# Altium PCB PCB1.PcbDoc
Units mm, origin at the board's own origin, x right, y up, seen from the top; angles counter-clockwise.
Board outline 52.25 x 52.25 mm, 2 copper layers (Top Layer, Bottom Layer); 13 components, 106 nets, 220 pads, 0 vias.
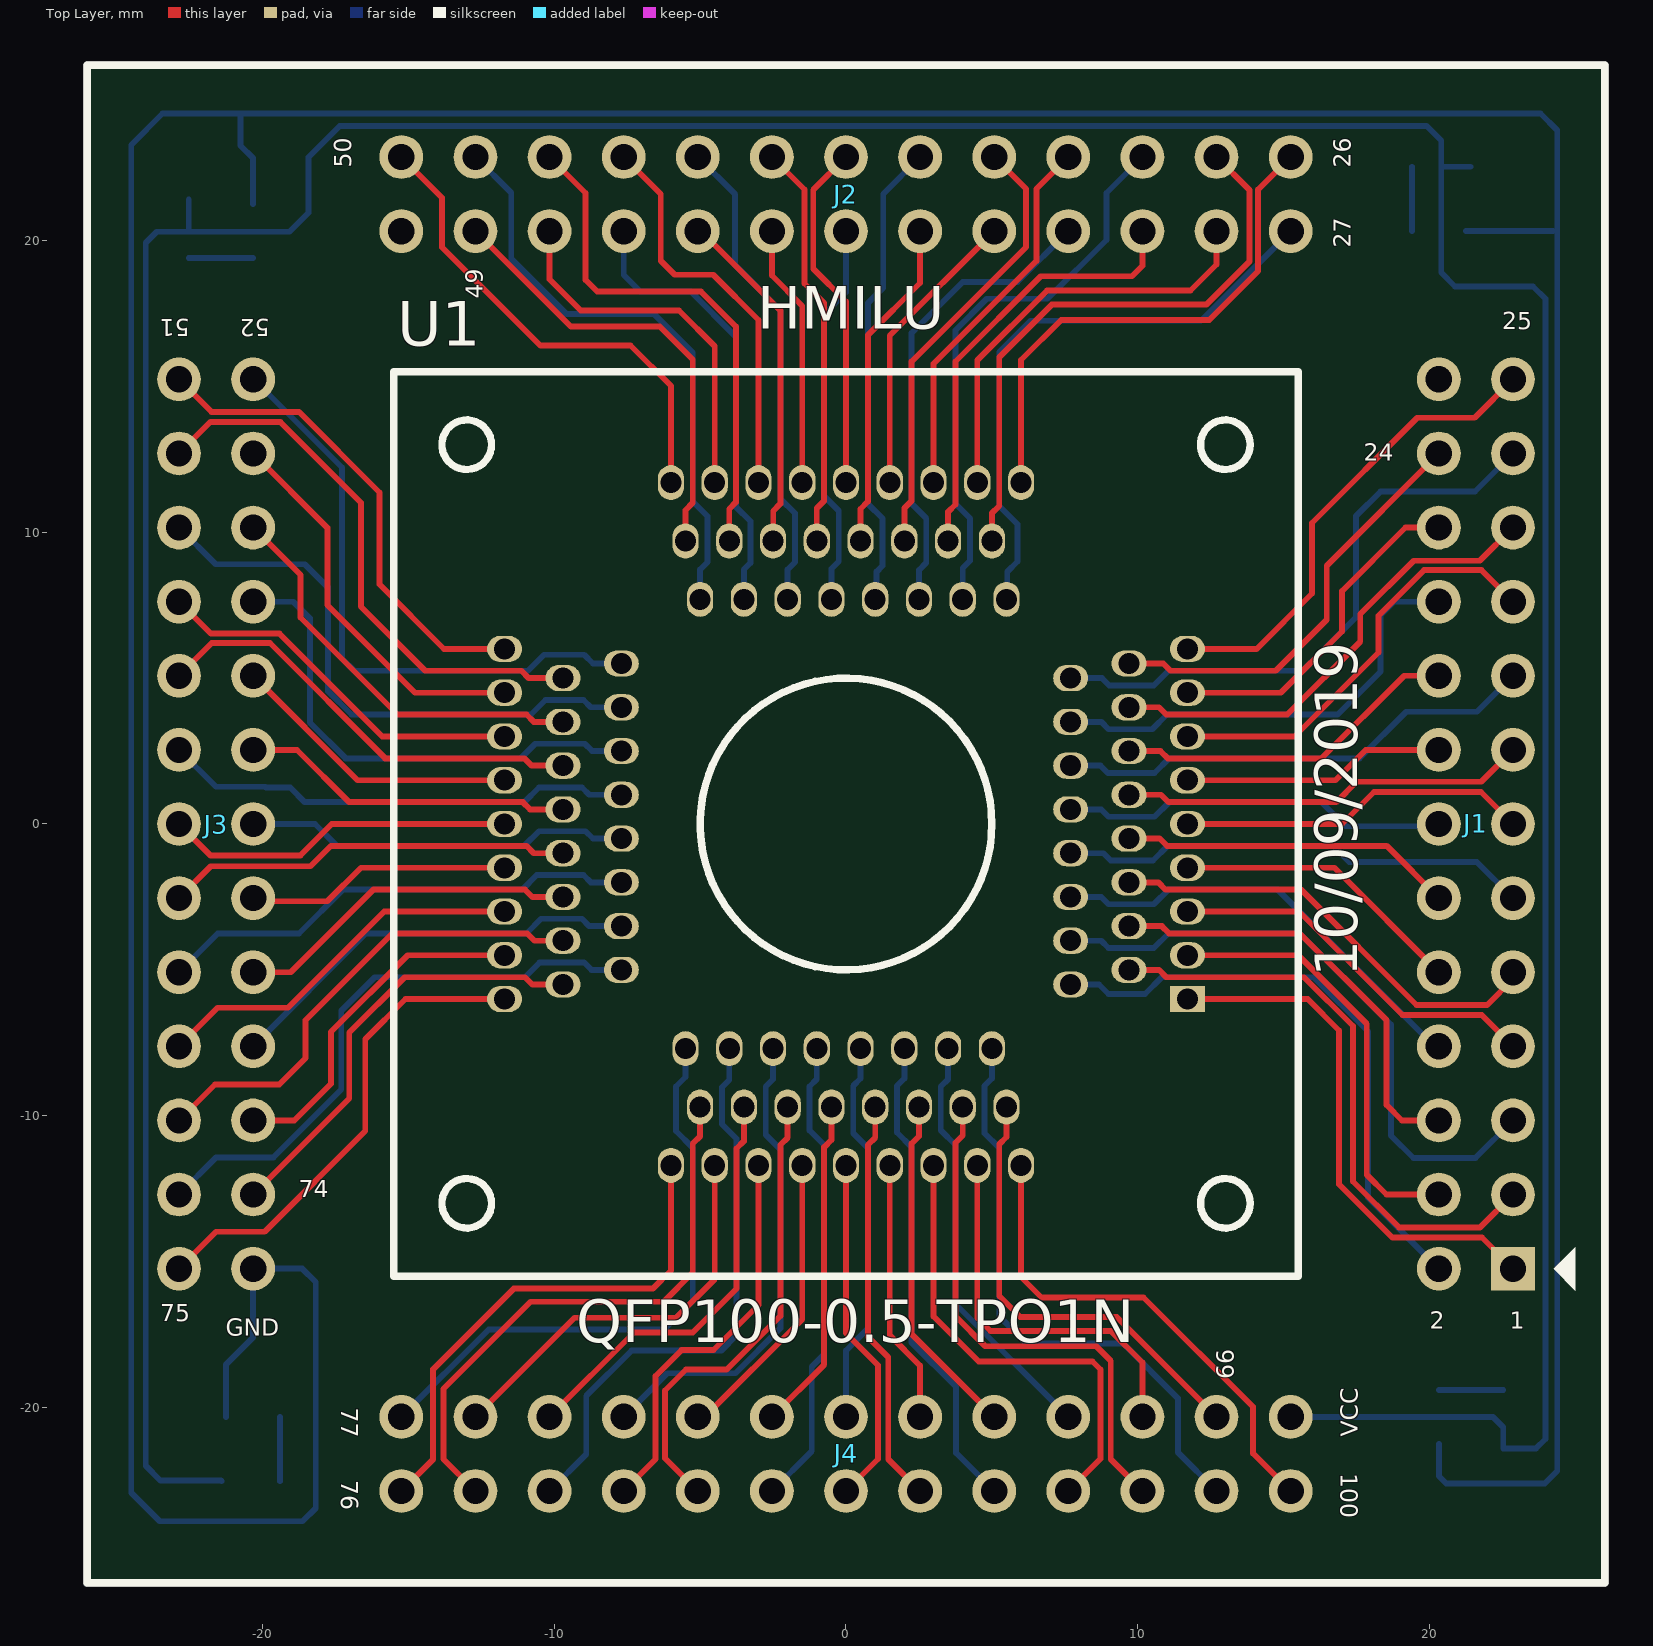
[diagram p0: Top Layer view]
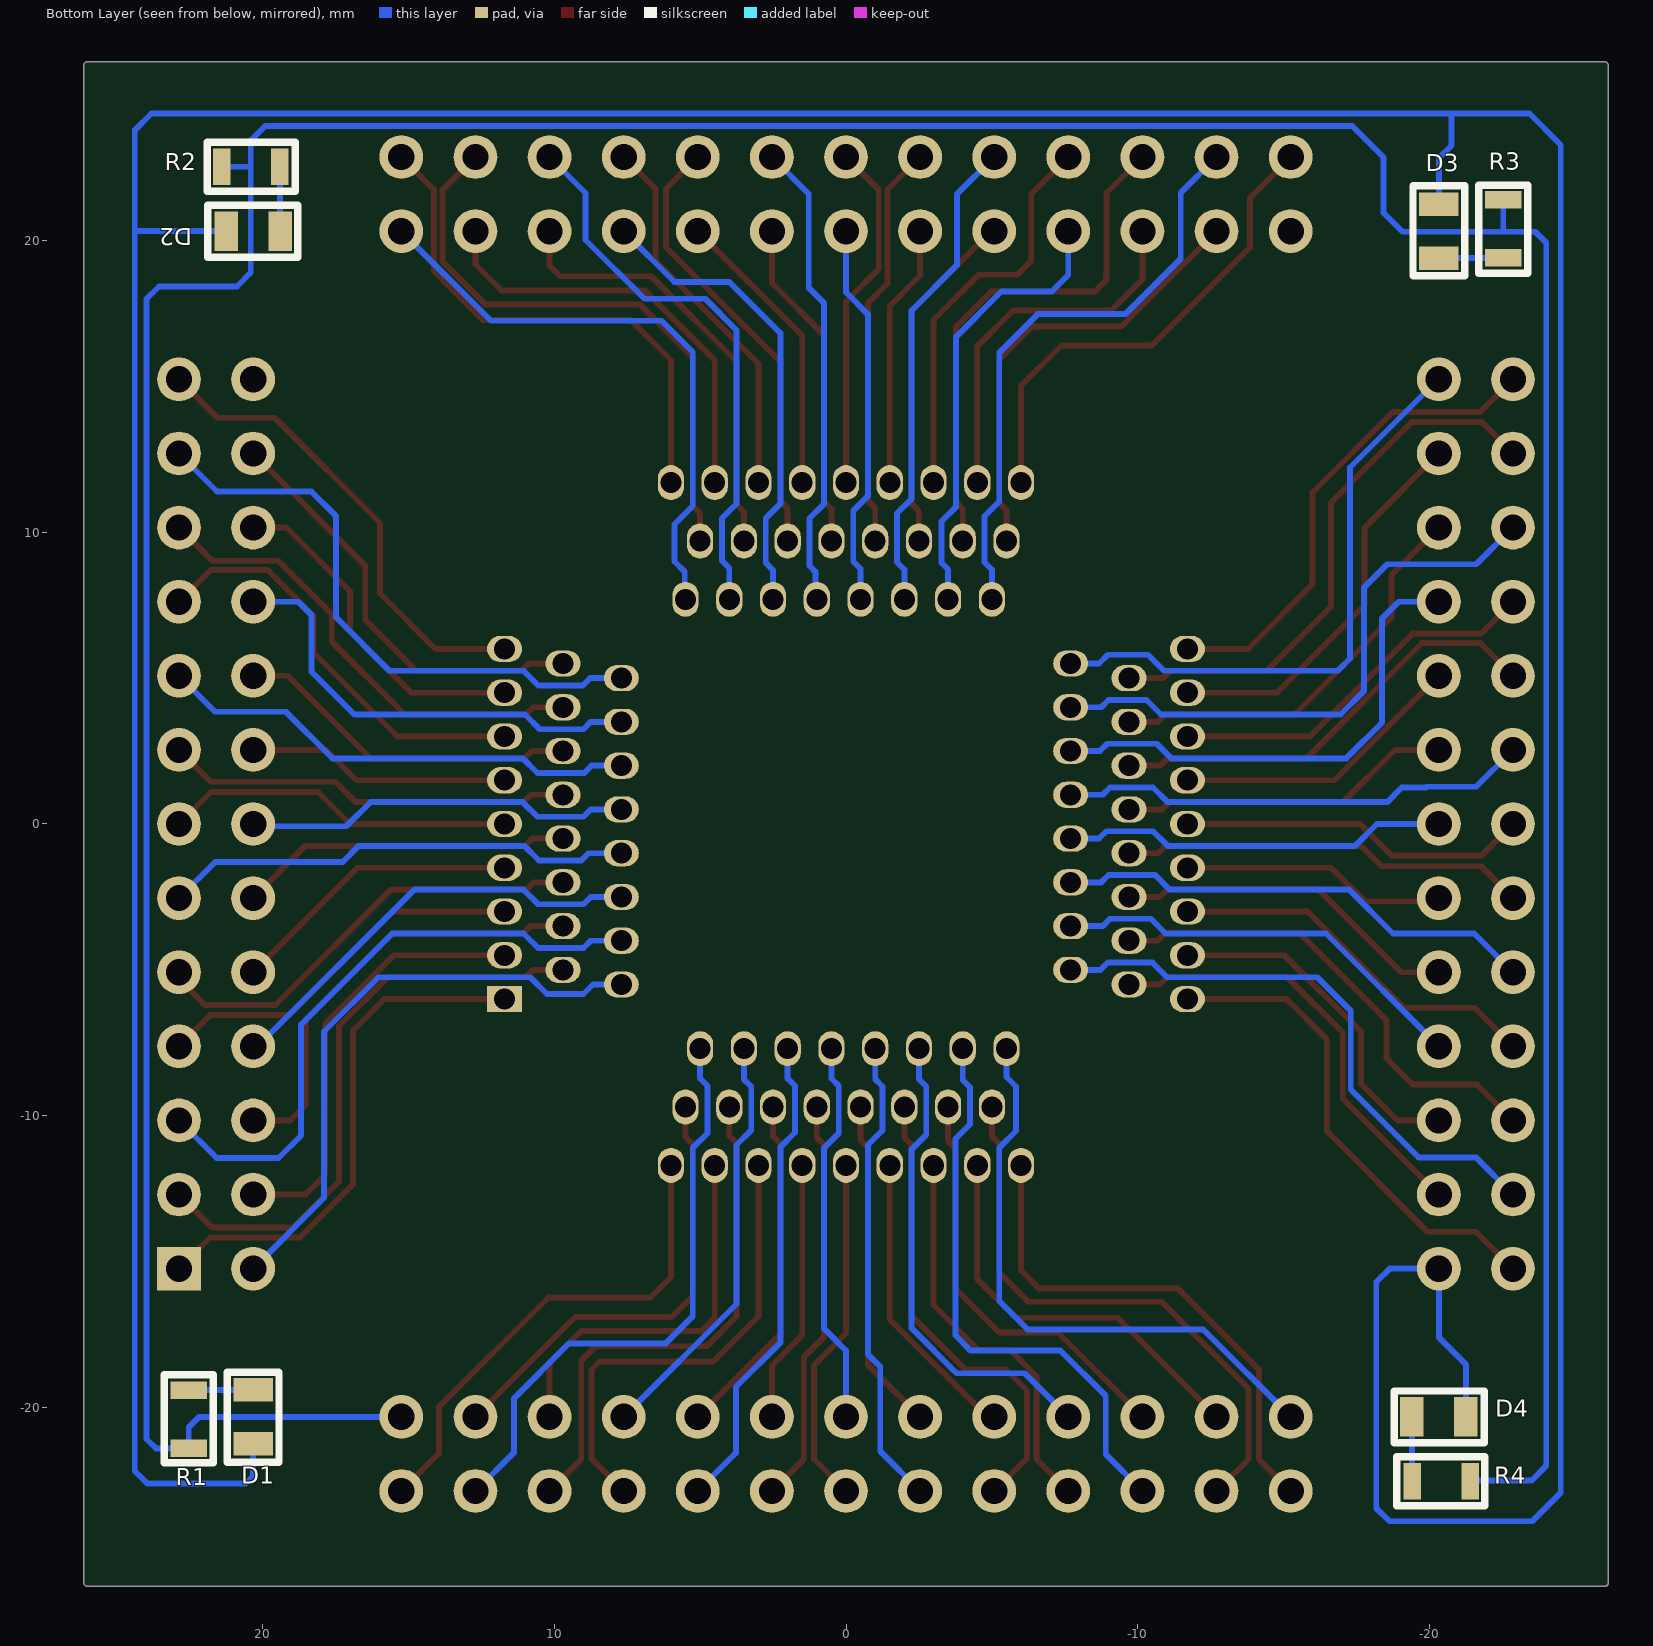
[diagram p1: Bottom Layer view, seen from below]

## Layer stack, top to bottom
Top Solder: solder mask 0.0102, Solder Resist, Dk 3.5
Top Layer: signal copper 0.0356
Dielectric 1: dielectric 0.32, FR-4, Dk 4.8
Bottom Layer: signal copper 0.0356
Bottom Solder: solder mask 0.0102, Solder Resist, Dk 3.5

## Board outline
-26.127,-26 -26.127,26 cw(c-26,26) -26,26.127 26,26.127 cw(c26,26) 26.127,26 26.127,-26 cw(c26,-26) 26,-26.127 -26,-26.127 cw(c-26,-26)
cut-out: 2.5,4.33
cut-out: 0.25,5.08
cut-out: 0.25,5.08

## Design rules (kind name [scope] priority, off if disabled: settings)
Clearance [All] p1: gap=0.01 ignorepadtopadclearanceinfootprint=FALSE
PolygonConnect [All] p1: connectstyle=Relief reliefconductorwidth=0.254 reliefentries=4 polygonreliefangle="90 Angle" airgapwidth=0.254
RoutingVias [All] p1: holewidth=0.711 width=1.27 viastyle="Through Hole" minholewidth=0.711 minwidth=1.27 maxholewidth=0.711 maxwidth=1.27
SolderMaskExpansion [All] p1: expansion=0.102
Width [All] p1: maxlimit=0.254 minlimit=0.2 preferedwidth=0.2
30 further rules are at their usual default settings.

## Components (designator, comment, footprint, x,y, rotation, side; value= is the part's Value field where it differs from the comment)
D1 "LED0805" L0805RED 20.32,-20.32 r180 bottom
D2 "LED0805" L0805RED 20.32,20.32 r270 bottom
D3 "LED0805" L0805RED -20.32,20.32 r0 bottom
D4 "LED0805" L0805RED -20.32,-20.32 r90 bottom
J1 "Header 13x2 TH Pitch 2.54mm" "Header 13x2 TH Pitch 2.54mm"#1 21.59,1.27 r180 top
J2 "Header 13x2 TH Pitch 2.54mm" "Header 13x2 TH Pitch 2.54mm"#2 -1.27,21.59 r270 top
J3 "Header 13x2 TH Pitch 2.54mm" "Header 13x2 TH Pitch 2.54mm"#2 -21.59,-1.27 r0 top
J4 "Header 13x2 TH Pitch 2.54mm" "Header 13x2 TH Pitch 2.54mm"#2 1.27,-21.59 r90 top
R1 "10k" R0805 21,-20.45 r270 bottom
R2 "10k" R0805 20.45,21 r0 bottom
R3 "10k" R0805 -21,20.45 r90 bottom
R4 "10k" R0805 -20.45,-21 r180 bottom
U1 "QFP100-0.5 SOCKET" "QFP100-0.5 SOCKET" 0,0 r0 top

## Footprints (in the part's own frame and the unit in brackets; to place one, negate y for a bottom-side part, rotate by r counter-clockwise, add the part's x,y. Pads: shape width x height; smd on the part's side, far side on the other; paste and mask are expansions set on the pad)
"Header 13x2 TH Pitch 2.54mm"#1 [mm]
  rect 1.5x1.5 hole 0.9: 1(-1.27,16.51)
  round 1.5 hole 0.9: 2(1.27,16.51) 3(-1.27,13.97) 4(1.27,13.97) 5(-1.27,11.43) 6(1.27,11.43) 7(-1.27,8.89) 8(1.27,8.89) 9(-1.27,6.35) 10(1.27,6.35) 11(-1.27,3.81) 12(1.27,3.81) 13(-1.27,1.27) 14(1.27,1.27) 15(-1.27,-1.27) 16(1.27,-1.27) 17(-1.27,-3.81) 18(1.27,-3.81) 19(-1.27,-6.35) 20(1.27,-6.35) 21(-1.27,-8.89) 22(1.27,-8.89) 23(-1.27,-11.43) 24(1.27,-11.43) 25(-1.27,-13.97) 26(1.27,-13.97)
  body extent -2.54,-15.24 2.54,17.78, height 9.5
"Header 13x2 TH Pitch 2.54mm"#2 [mm]
  round 1.5 hole 0.9: 1(-1.27,16.51) 2(1.27,16.51) 3(-1.27,13.97) 4(1.27,13.97) 5(-1.27,11.43) 6(1.27,11.43) 7(-1.27,8.89) 8(1.27,8.89) 9(-1.27,6.35) 10(1.27,6.35) 11(-1.27,3.81) 12(1.27,3.81) 13(-1.27,1.27) 14(1.27,1.27) 15(-1.27,-1.27) 16(1.27,-1.27) 17(-1.27,-3.81) 18(1.27,-3.81) 19(-1.27,-6.35) 20(1.27,-6.35) 21(-1.27,-8.89) 22(1.27,-8.89) 23(-1.27,-11.43) 24(1.27,-11.43) 25(-1.27,-13.97) 26(1.27,-13.97)
  body extent -2.54,-15.24 2.54,17.78, height 9.5
L0805RED [mm]
  rect 1.35x0.8 smd: 1(0,0.925) 2(0,-0.925)
  silkscreen extent -0.89,-1.55 0.89,1.52, body extent -0.67,-1.05 0.68,1.05, height 0.9
"QFP100-0.5 SOCKET" [mm]
  rect 1.2x0.9 hole 0.72: 1(11.7,-6)
  oval 1.2x0.9 hole 0.72: 2(7.7,-5.5) 3(9.7,-5) 4(11.7,-4.5) 5(7.7,-4) 6(9.7,-3.5) 7(11.7,-3) 8(7.7,-2.5) 9(9.7,-2) 10(11.7,-1.5) 11(7.7,-1) 12(9.7,-0.5) 13(11.7,0) 14(7.7,0.5) 15(9.7,1) 16(11.7,1.5) 17(7.7,2) 18(9.7,2.5) 19(11.7,3) 20(7.7,3.5) 21(9.7,4) 22(11.7,4.5) 23(7.7,5) 24(9.7,5.5) 25(11.7,6) 51(-11.7,6) 52(-7.7,5.5) 53(-9.7,5) 54(-11.7,4.5) 55(-7.7,4) 56(-9.7,3.5) 57(-11.7,3) 58(-7.7,2.5) 59(-9.7,2) 60(-11.7,1.5) 61(-7.7,1) 62(-9.7,0.5) 63(-11.7,0) 64(-7.7,-0.5) 65(-9.7,-1) 66(-11.7,-1.5) 67(-7.7,-2) 68(-9.7,-2.5) 69(-11.7,-3) 70(-7.7,-3.5) 71(-9.7,-4) 72(-11.7,-4.5) 73(-7.7,-5) 74(-9.7,-5.5) 75(-11.7,-6)
  oval 0.9x1.2 hole 0.72: 26(6,11.7) 27(5.5,7.7) 28(5,9.7) 29(4.5,11.7) 30(4,7.7) 31(3.5,9.7) 32(3,11.7) 33(2.5,7.7) 34(2,9.7) 35(1.5,11.7) 36(1,7.7) 37(0.5,9.7) 38(0,11.7) 39(-0.5,7.7) 40(-1,9.7) 41(-1.5,11.7) 42(-2,7.7) 43(-2.5,9.7) 44(-3,11.7) 45(-3.5,7.7) 46(-4,9.7) 47(-4.5,11.7) 48(-5,7.7) 49(-5.5,9.7) 50(-6,11.7) 76(-6,-11.7) 77(-5.5,-7.7) 78(-5,-9.7) 79(-4.5,-11.7) 80(-4,-7.7) 81(-3.5,-9.7) 82(-3,-11.7) 83(-2.5,-7.7) 84(-2,-9.7) 85(-1.5,-11.7) 86(-1,-7.7) 87(-0.5,-9.7) 88(0,-11.7) 89(0.5,-7.7) 90(1,-9.7) 91(1.5,-11.7) 92(2,-7.7) 93(2.5,-9.7) 94(3,-11.7) 95(3.5,-7.7) 96(4,-9.7) 97(4.5,-11.7) 98(5,-7.7) 99(5.5,-9.7) 100(6,-11.7)
  silkscreen extent -15.5,-15.5 15.5,15.5
R0805 [mm]
  rect 0.6x1.24 smd: 1(-1.05,-1.524) 2(0.95,-1.524)
  silkscreen extent -1.57,-2.36 1.45,-0.69, body extent -1.05,-2.15 0.95,-0.9, height 0.45

## Part data
R1 R2 R3 R4: library part Resistor

## Nets (pads, with @x,y where several pads share a name; then routed paths per layer and width w, separated by ;. In a path a pad name is that pad's centre, name@x,y a point inside that pad or via, vN(x,y) a via of type N, cw(c..) or ccw(c..) an arc to the next point about the centre after c; other vN are vias at no path point)
1_1: J1.1 U1.1 | length 18.1
  Top Layer w0.2: U1.1 15.825,-6 16.9,-7.075 16.9,-12.35 18.725,-14.175 21.795,-14.175 J1.1
1_2: J1.2 U1.2 | length 20.5
  Bottom Layer w0.2: U1.2 8.675,-5.5 9,-5.825 10.25,-5.825 10.825,-5.25 16.025,-5.25 17.89,-7.115 17.89,-12.809 J1.2
1_3: J1.3 U1.3 | length 20.4
  Top Layer w0.2: U1.3 10.725,-5 10.975,-5.25 15.7,-5.25 17.375,-6.925 17.375,-12.25 18.95,-13.825 21.735,-13.825 J1.3
1_4: J1.4 U1.4 | length 15
  Top Layer w0.2: U1.4 15.5,-4.5 17.85,-6.85 17.85,-12.025 18.525,-12.7 J1.4
1_5: J1.5 U1.5 | length 21.4
  Bottom Layer w0.2: U1.5 8.75,-4 9,-4.25 10.55,-4.25 11.05,-3.75 15.55,-3.75 18.675,-6.875 18.675,-10.674 19.451,-11.45 21.57,-11.45 J1.5
1_6: J1.6 U1.6 | length 15.1
  Top Layer w0.2: U1.6 10.825,-3.5 11.075,-3.75 15.55,-3.75 18.53,-6.73 18.53,-9.63 19.06,-10.16 J1.6
1_7: J1.7 U1.7 | length 13.1
  Top Layer w0.2: U1.7 15.525,-3 19.075,-6.55 21.79,-6.55 J1.7
1_8: J1.8 U1.8 | length 15.2
  Bottom Layer w0.2: U1.8 8.75,-2.5 9,-2.75 10.55,-2.75 11.05,-2.25 14.8,-2.25 20.17,-7.62 J1.8
1_9: J1.9 U1.9 | length 15.5
  Top Layer w0.2: U1.9 10.7,-2 10.95,-2.25 15.6,-2.25 19.55,-6.2 21.975,-6.2 22.86,-5.315 J1.9
1_10: J1.10 U1.10 | length 10.1
  Top Layer w0.2: U1.10 16.74,-1.5 J1.10
1_11: J1.11 U1.11 | length 16.2
  Bottom Layer w0.2: U1.11 8.825,-1 9.075,-1.25 10.525,-1.25 11.025,-0.75 16.7,-0.75 17.25,-1.3 21.62,-1.3 J1.11
1_12: J1.12 U1.12 | length 11.5
  Top Layer w0.2: U1.12 10.75,-0.5 11,-0.75 18.53,-0.75 J1.12
1_13: J1.13 U1.13 | length 12.1
  Top Layer w0.2: U1.13 17,0 18.1,1.1 21.76,1.1 J1.13
1_14: J1.14 U1.14 | length 13.3
  Bottom Layer w0.2: U1.14 8.75,0.5 9,0.25 10.575,0.25 11.075,0.75 16.3,0.75 17.125,-0.075 20.245,-0.075 J1.14
1_15: J1.15 U1.15 | length 14
  Top Layer w0.2: U1.15 10.8,1 11.05,0.75 16.8,0.75 17.5,1.45 21.77,1.45 J1.15
1_16: J1.16 U1.16 | length 9.1
  Top Layer w0.2: U1.16 16.775,1.5 17.815,2.54 J1.16
1_17: J1.17 U1.17 | length 16.6
  Bottom Layer w0.2: U1.17 8.725,2 8.975,1.75 10.575,1.75 11.075,2.25 17.6,2.25 19.2,3.85 21.63,3.85 J1.17
1_18: J1.18 U1.18 | length 11.9
  Top Layer w0.2: U1.18 10.775,2.5 11.025,2.25 16.3,2.25 19.13,5.08 J1.18
1_19: J1.19 U1.19 | length 14.7
  Top Layer w0.2: U1.19 15.375,3 18.25,5.875 18.25,7.137 19.813,8.7 21.78,8.7 J1.19
1_20: J1.20 U1.20 | length 15.7
  Bottom Layer w0.2: U1.20 8.75,3.5 9,3.25 10.5,3.25 11,3.75 16.85,3.75 18.325,5.225 18.325,7.175 18.77,7.62 J1.20
1_21: J1.21 U1.21 | length 16.5
  Top Layer w0.2: U1.21 10.725,4 10.975,3.75 15.125,3.75 17.625,6.25 17.625,7.195 19.455,9.025 21.725,9.025 J1.21
1_22: J1.22 U1.22 | length 11.8
  Top Layer w0.2: U1.22 14.9,4.5 17,6.6 17,7.981 19.179,10.16 J1.22
1_23: J1.23 U1.23 | length 20.6
  Bottom Layer w0.2: U1.23 8.775,5 9.025,4.75 10.55,4.75 11.05,5.25 15.65,5.25 17.475,7.075 17.475,10.55 18.325,11.4 21.56,11.4 J1.23
1_24: J1.24 U1.24 | length 14.9
  Top Layer w0.2: U1.24 10.875,5.5 11.125,5.25 14.725,5.25 16.475,7 16.475,8.855 J1.24
1_25: J1.25 U1.25 | length 16.4
  Top Layer w0.2: U1.25 14.075,6 15.975,7.9 15.975,10.32 19.58,13.925 21.545,13.925 J1.25
1_26: J2.1 U1.26 | length 18
  Top Layer w0.2: U1.26 6,15.9 7.375,17.275 12.449,17.275 14.125,18.951 14.125,21.745 J2.1
1_27: J2.2 U1.27 | length 20.6
  Bottom Layer w0.2: U1.27 5.525,7.725 5.525,8.65 5.875,9 5.875,10.275 5.25,10.9 5.25,16.175 6.325,17.25 12.17,17.25 J2.2
1_28: J2.3 U1.28 | length 20.4
  Top Layer w0.2: U1.28 5,10.65 5.25,10.9 5.25,16 7.05,17.8 12.35,17.8 13.825,19.275 13.825,21.735 J2.3
1_29: J2.4 U1.29 | length 14.9
  Top Layer w0.2: U1.29 4.5,15.895 6.893,18.288 11.811,18.288 12.7,19.177 J2.4
1_30: J2.5 U1.30 | length 19.3
  Bottom Layer w0.2: U1.30 4,8.775 4.25,9.025 4.25,10.475 3.75,10.975 3.75,16.925 4.825,18 6.907,18 8.925,20.018 8.925,21.625 J2.5
1_31: J2.6 U1.31 | length 15.2
  Top Layer w0.2: U1.31 3.5,10.7 3.75,10.95 3.75,15.848 6.677,18.775 9.8,18.775 10.16,19.135 J2.6
1_32: J2.7 U1.32 | length 13.1
  Top Layer w0.2: U1.32 3,15.775 6.525,19.3 6.525,21.765 J2.7
1_33: J2.8 U1.33 | length 16.3
  Bottom Layer w0.2: U1.33 2.5,8.7 2.75,8.95 2.75,10.475 2.25,10.975 2.25,16.825 4,18.575 5.875,18.575 J2.8
1_34: J2.9 U1.34 | length 15.3
  Top Layer w0.2: U1.34 2,10.825 2.25,11.075 2.25,15.848 6.175,19.773 6.175,21.765 J2.9
1_35: J2.10 U1.35 | length 10.1
  Top Layer w0.2: U1.35 1.5,16.74 J2.10
1_36: J2.11 U1.36 | length 16.2
  Bottom Layer w0.2: U1.36 1.05,7.75 1.05,8.65 1.25,8.85 1.25,10.475 0.75,10.975 0.75,17.85 1.275,18.375 1.275,21.595 J2.11
1_37: J2.12 U1.37 | length 11.5
  Top Layer w0.2: U1.37 0.5,10.8 0.75,11.05 0.75,16.75 2.54,18.54 J2.12
1_38: J2.13 U1.38 | length 12.1
  Top Layer w0.2: U1.38 0,17.907 -1.125,19.032 -1.125,21.735 J2.13
1_39: J2.14 U1.39 | length 13.2
  Bottom Layer w0.2: U1.39 -0.5,8.75 -0.25,9 -0.25,10.737 -0.75,11.238 -0.75,17.475 0,18.225 J2.14
1_40: J2.15 U1.40 | length 14
  Top Layer w0.2: J2.15 -1.425,21.745 -1.425,18.525 -0.75,17.85 -0.75,11.075 -1,10.825 U1.40
1_41: J2.16 U1.41 | length 9.1
  Top Layer w0.2: J2.16 -2.54,18.796 -1.5,17.756 U1.41
1_42: J2.17 U1.42 | length 16.6
  Bottom Layer w0.2: J2.17 -3.8,21.58 -3.8,19.15 -2.25,17.6 -2.25,11.15 -1.75,10.65 -1.75,8.975 -2,8.725 U1.42
1_43: J2.18 U1.43 | length 12
  Top Layer w0.2: J2.18 -4.972,20.32 -2.25,17.598 -2.25,10.975 -2.494,10.731 -2.494,9.706 U1.43
1_44: J2.19 U1.44 | length 13.8
  Top Layer w0.2: J2.19 -6.35,21.59 -6.35,19.301 -5.874,18.825 -4.55,18.825 -3,17.275 U1.44
1_45: J2.20 U1.45 | length 15.5
  Bottom Layer w0.2: J2.20 -7.62,18.82 -7.05,18.25 -5.325,18.25 -3.775,16.7 -3.775,10.875 -3.275,10.375 -3.275,8.95 -3.5,8.725 U1.45
1_46: J2.21 U1.46 | length 18
  Top Layer w0.2: J2.21 -8.925,21.625 -8.925,18.65 -8.525,18.25 -4.975,18.25 -3.775,17.05 -3.775,11.025 -4,10.8 U1.46
1_47: J2.22 U1.47 | length 12.9
  Top Layer w0.2: J2.22 -10.16,18.669 -9.089,17.598 -5.723,17.598 -4.5,16.375 U1.47
1_48: J2.23 U1.48 | length 20.3
  Bottom Layer w0.2: J2.23 -11.475,21.635 -11.475,19.375 -9.575,17.475 -6.575,17.475 -5.25,16.15 -5.25,11.05 -4.75,10.55 -4.75,8.975 -5,8.725 U1.48
1_49: J2.24 U1.49 | length 15.6
  Top Layer w0.2: J2.24 -9.43,17.05 -6.382,17.05 -5.25,15.918 -5.25,11.006 -5.5,10.756 U1.49
1_50: J2.25 U1.50 | length 16.8
  Top Layer w0.2: J2.25 -13.843,21.463 -13.843,19.768 -10.475,16.4 -7.383,16.4 -6,15.017 U1.50
1_51: J3.1 U1.51 | length 16.8
  Top Layer w0.2: J3.1 -21.745,14.125 -18.75,14.125 -15.99,11.365 -15.99,8.215 -13.775,6 U1.51
1_52: J3.2 U1.52 | length 20.9
  Bottom Layer w0.2: J3.2 -20.31,15.25 -17.275,12.215 -17.275,5.675 -16.85,5.25 -10.9,5.25 -10.35,5.8 -8.975,5.8 -8.675,5.5 U1.52
1_53: J3.3 U1.53 | length 19.4
  Top Layer w0.2: J3.3 -21.785,13.775 -19.387,13.775 -16.625,11.013 -16.625,7.45 -14.425,5.25 -11.125,5.25 -10.875,5 U1.53 U1.53@-9.725,5.025
1_54: J3.4 U1.54 | length 13.6
  Top Layer w0.2: J3.4 -17.775,10.155 -17.775,7.505 -14.77,4.5 U1.54
1_55: J3.5 U1.55 | length 20.2
  Bottom Layer w0.2: J3.5 -21.6,8.9 -18.55,8.9 -17.75,8.1 -17.75,4.55 -16.95,3.75 -10.8,3.75 -10.3,4.25 -9,4.25 -8.75,4 U1.55
1_56: J3.6 U1.56 | length 14.3
  Top Layer w0.2: J3.6@-20.305,10.175 J3.6 -18.7,8.54 -18.7,7.075 -15.375,3.75 -10.95,3.75 -10.7,3.5 U1.56
1_57: J3.7 U1.57 | length 13.1
  Top Layer w0.2: J3.7 -21.765,6.525 -19.42,6.525 -15.895,3 U1.57
1_58: J3.8 U1.58 | length 17.2
  Bottom Layer w0.2: J3.8 -18.945,7.62 -18.375,7.05 -18.375,3.475 -17.15,2.25 -11.15,2.25 -10.65,2.75 -8.95,2.75 -8.7,2.5 U1.58
1_59: J3.9 U1.59 | length 15.4
  Top Layer w0.2: J3.9 -21.74,6.2 -19.745,6.2 -15.795,2.25 -11.025,2.25 -10.775,2 U1.59
1_60: J3.10 U1.60 | length 10.1
  Top Layer w0.2: J3.10 -16.74,1.5 U1.60
1_61: J3.11 U1.61 | length 16.2
  Bottom Layer w0.2: J3.11 -21.595,1.275 -19.9,1.275 -19.875,1.25 -19.05,1.25 -18.55,0.75 -11.025,0.75 -10.525,1.25 -9.05,1.25 -8.8,1 U1.61
1_62: J3.12 U1.62 | length 11.5
  Top Layer w0.2: J3.12 -18.815,2.54 -17.025,0.75 -11.075,0.75 -10.825,0.5 U1.62
1_63: J3.13 U1.63 | length 12.1
  Top Layer w0.2: J3.13 -21.785,-1.075 -18.7,-1.075 -17.625,0 U1.63
1_64: J3.14 U1.64 | length 13.2
  Bottom Layer w0.2: J3.14 -18.2,0 -17.45,-0.75 -11.025,-0.75 -10.525,-0.25 -8.925,-0.25 -8.675,-0.5 U1.64
1_65: J3.15 U1.65 | length 14
  Top Layer w0.2: J3.15 -21.77,-1.45 -18.35,-1.45 -17.65,-0.75 -10.95,-0.75 -10.7,-1 U1.65
1_66: J3.16 U1.66 | length 9.1
  Top Layer w0.2: J3.16 -20.21,-2.65 -17.775,-2.65 -16.625,-1.5 U1.66
1_67: J3.17 U1.67 | length 16.6
  Bottom Layer w0.2: J3.17 -21.53,-3.75 -18.75,-3.75 -17.25,-2.25 -11.1,-2.25 -10.6,-1.75 -9,-1.75 -8.75,-2 U1.67
1_68: J3.18 U1.68 | length 11.9
  Top Layer w0.2: J3.18 -19.03,-5.08 -16.2,-2.25 -11,-2.25 -10.75,-2.5 U1.68
1_69: J3.19 U1.69 | length 13.1
  Top Layer w0.2: J3.19 -21.54,-6.3 -19.125,-6.3 -15.825,-3 U1.69
1_70: J3.20 U1.70 | length 14.5
  Bottom Layer w0.2: J3.20 -16.45,-3.75 -10.95,-3.75 -10.45,-3.25 -9.05,-3.25 -8.8,-3.5 U1.70
1_71: J3.21 U1.71 | length 16.7
  Top Layer w0.2: J3.21 -21.625,-8.925 -19.425,-8.925 -18.525,-8.025 -18.525,-6.725 -15.55,-3.75 -10.925,-3.75 -10.675,-4 U1.71
1_72: J3.22 U1.72 | length 12
  Top Layer w0.2: J3.22 -18.91,-10.16 -17.65,-8.9 -17.65,-7.125 -15.025,-4.5 U1.72
1_73: J3.23 U1.73 | length 20.1
  Bottom Layer w0.2: J3.23 -21.585,-11.425 -19.625,-11.425 -17.3,-9.1 -17.3,-6.4 -16.15,-5.25 -11,-5.25 -10.5,-4.75 -8.975,-4.75 -8.725,-5 U1.73
1_74: J3.24 U1.74 | length 15.1
  Top Layer w0.2: J3.24 -17.025,-9.405 -17.025,-7.15 -15.125,-5.25 -11,-5.25 -10.75,-5.5 U1.74
1_75: J3.25 U1.75 | length 16.8
  Top Layer w0.2: J3.25 -21.595,-13.975 -19.925,-13.975 -16.475,-10.525 -16.475,-7.375 -15.1,-6 U1.75
1_76: J4.1 U1.76 | length 17.8
  Top Layer w0.2: J4.1 -14.15,-21.77 -14.15,-18.687 -11.388,-15.925 -6.625,-15.925 -6,-15.3 U1.76
1_77: J4.2 U1.77 | length 20.7
  Bottom Layer w0.2: J4.2 -12.245,-17.325 -6.225,-17.325 -5.25,-16.35 -5.25,-11.1 -5.825,-10.525 -5.825,-9 -5.5,-8.675 U1.77
1_78: J4.3 U1.78 | length 19.9
  Top Layer w0.2: J4.3 -13.8,-21.76 -13.8,-19.365 -10.81,-16.375 -6.25,-16.375 -5.25,-15.375 -5.25,-10.95 -5,-10.7 U1.78
1_79: J4.4 U1.79 | length 14.1
  Top Layer w0.2: J4.4 -9.305,-16.925 -5.825,-16.925 -4.5,-15.6 U1.79
1_80: J4.5 U1.80 | length 19.9
  Bottom Layer w0.2: J4.5 -8.9,-21.6 -8.9,-19.6 -7.35,-18.05 -4.275,-18.05 -3.75,-17.525 -3.75,-10.787 -4.25,-10.288 -4.25,-9.025 -4,-8.775 U1.80
1_81: J4.6 U1.81 | length 14.6
  Top Layer w0.2: J4.6 -7.265,-17.425 -5.25,-17.425 -3.75,-15.925 -3.75,-11.125 -3.5,-10.875 U1.81
1_82: J4.7 U1.82 | length 13.7
  Top Layer w0.2: J4.7 -6.525,-21.765 -6.525,-18.918 -5.632,-18.025 -4.538,-18.025 -3,-16.487 U1.82
1_83: J4.8 U1.83 | length 16.5
  Bottom Layer w0.2: J4.8 -6.123,-18.823 -3.788,-18.823 -2.25,-17.285 -2.25,-11.15 -2.75,-10.65 -2.75,-9 -2.5,-8.75 U1.83
1_84: J4.9 U1.84 | length 16.2
  Top Layer w0.2: J4.9 -6.2,-21.74 -6.2,-19.416 -5.484,-18.7 -4.09,-18.7 -2.25,-16.86 -2.25,-11 -2,-10.75 U1.84
1_85: J4.10 U1.85 | length 10.2
  Top Layer w0.2: J4.10 -4.838,-20.32 -1.5,-16.982 U1.85
1_86: J4.11 U1.86 | length 16.2
  Bottom Layer w0.2: J4.11 -1.175,-21.495 -1.175,-18.6 -0.75,-18.175 -0.75,-11 -1.25,-10.5 -1.25,-9 -1,-8.75 U1.86
1_87: J4.12 U1.87 | length 11.5
  Top Layer w0.2: J4.12 -0.75,-18.53 -0.75,-11.075 -0.5,-10.825 U1.87
1_88: J4.13 U1.88 | length 12.1
  Top Layer w0.2: J4.13 1.1,-21.76 1.1,-18.55 0,-17.45 U1.88
1_89: J4.14 U1.89 | length 13.2
  Bottom Layer w0.2: J4.14 0,-18.05 0.75,-17.3 0.75,-11.1 0.25,-10.6 0.25,-8.975 0.5,-8.725 U1.89
1_90: J4.15 U1.90 | length 14
  Top Layer w0.2: U1.90 1,-10.75 0.75,-11 0.75,-17.578 1.45,-18.278 1.45,-21.77 J4.15
1_91: J4.16 U1.91 | length 9.1
  Top Layer w0.2: U1.91 1.5,-17.525 2.54,-18.565 J4.16
1_92: J4.17 U1.92 | length 16.6
  Bottom Layer w0.2: U1.92 2,-8.725 1.75,-8.975 1.75,-10.575 2.25,-11.075 2.25,-17.775 3.775,-19.3 3.775,-21.555 J4.17
1_93: J4.18 U1.93 | length 11.9
  Top Layer w0.2: U1.93 2.5,-10.7 2.25,-10.95 2.25,-17.49 J4.18
1_94: J4.19 U1.94 | length 16.3
  Top Layer w0.2: U1.94 3,-16.875 4.55,-18.425 8.45,-18.425 8.725,-18.7 8.725,-21.755 J4.19
1_95: J4.20 U1.95 | length 14.5
  Bottom Layer w0.2: U1.95 3.5,-8.75 3.25,-9 3.25,-10.5 3.75,-11 3.75,-16.45 J4.20
1_96: J4.21 U1.96 | length 18.1
  Top Layer w0.2: U1.96 4,-10.675 3.75,-10.925 3.75,-16.875 4.775,-17.9 8.575,-17.9 9.075,-18.4 9.075,-21.775 J4.21
1_97: J4.22 U1.97 | length 13.4
  Top Layer w0.2: U1.97 4.5,-16.925 4.95,-17.375 9.075,-17.375 10.16,-18.46 J4.22
1_98: J4.23 U1.98 | length 20.5
  Bottom Layer w0.2: U1.98 5,-8.725 4.75,-8.975 4.75,-10.6 5.25,-11.1 5.25,-16.875 6.175,-17.8 9.491,-17.8 11.375,-19.684 11.375,-21.535 J4.23
1_99: J4.24 U1.99 | length 15.7
  Top Layer w0.2: U1.99 5.5,-10.725 5.25,-10.975 5.25,-16.175 5.975,-16.9 9.28,-16.9 J4.24
1_100: J4.25 U1.100 | length 17
  Top Layer w0.2: U1.100 6,-15.525 6.7,-16.225 10.2,-16.225 13.95,-19.975 13.95,-21.57 J4.25
GND: D1.2 D2.2 D3.2 D4.2 J3.26 | length 175.9
  Bottom Layer w0.2: D4.2 -21.245,-18.52 -20.32,-17.595 J3.26 -18.635,-15.24 -18.175,-15.7 -18.175,-23.45 -18.625,-23.9 -23.525,-23.9 -24.5,-22.925 -24.5,-20.25 -24.5,23.275 -23.425,24.35 -20.75,24.35 ; D3.2 -20.32,22.82 -20.75,23.25 -20.75,24.35 ; D1.2 20.32,-22.345 20.575,-22.6 23.95,-22.6 24.375,-22.175 24.375,23.775 23.8,24.35 -20.75,24.35 ; D2.2 24.225,20.32
NetD1_1: D1.1 R1.1 | length 2.2
  Bottom Layer w0.2: D1.1 22.519,-19.395 R1.1
NetD2_1: D2.1 R2.1 | length 2.2
  Bottom Layer w0.2: D2.1 19.4,20.325 R2.1
NetD3_1: D3.1 R3.1 | length 2.2
  Bottom Layer w0.2: R3.1 -20.325,19.4 D3.1
NetD4_1: D4.1 R4.1 | length 2.2
  Bottom Layer w0.2: R4.1 -19.395,-22.519 D4.1
VCC: J4.26 R1.2 R2.2 R3.2 R4.2 | length 151.5
  Bottom Layer w0.2: R3.2 -22.524,20.324 -22.5,20.3 ; R4.2 -21.424,-22.5 -23.5,-22.5 -24,-22 -24,-17.05 -24,19.925 -23.625,20.3 -22.5,20.3 ; J4.26 22.17,-20.32 22.524,-20.674 R1.2 23.65,-21.4 23.975,-21.075 23.975,18 23.55,18.425 20.875,18.425 20.4,18.9 20.4,22.5 ; R2.2 20.424,22.524 20.4,22.5 ; -22.5,20.3 -19.075,20.3 -18.425,20.95 -18.425,22.85 -17.35,23.925 19.9,23.925 20.4,23.425 20.4,22.5
pads on no net: J1.26 J2.26

## Other copper
Bottom Layer:

## Silkscreen, mask and mechanical layers (free items; w line width, h text height)
Top Overlay:
  region: 24.25,-15.25 25,-14.5 25,-16
  lines w0.254: -26,-26 -26,26 26,26 26,-26 -26,-26
  text "50" at -16.75,22.5 h1 r90
  text "26" at 17.5,22.5 h1 r90
  text "27" at 17.5,19.75 h1 r90
  text "49" at -12.25,18 h1 r90
  text "51" at -22.5,17.5 h1 r180
  text "52" at -19.75,17.5 h1 r180
  text "25" at 22.5,16.75 h1
  text "HMILU" at -3.044,16.5 h2.5
  text "24" at 17.75,12.25 h1
  text "10/09/2019" at 18,-5.25 h2.5 r90
  text "74" at -18.75,-13 h1
  text "75" at -23.5,-17.25 h1
  text "2" at 20,-17.5 h1
  text "1" at 22.75,-17.5 h1
  text "GND" at -21.25,-17.75 h1
  text "99" at 12.5,-18 h1 r270
  text "QFP100-0.5-TPO1N" at -9.25,-18.25 h2.5
  text "77" at -17.5,-20 h1 r270
  text "VCC" at 17.75,-21 h1 r90
  text "100" at 16.75,-22.25 h1 r270
  text "76" at -17.5,-22.5 h1 r270